# Altium PCB Arduino_DUE_V02b.PcbDoc (part 3 of 3)
Units mil, origin at the board's own origin, x right, y up, seen from the top; angles counter-clockwise.
Board outline 4416.66 x 2112 mil, 4 copper layers (Top Layer, Mid-Layer 1, Mid-Layer 2, Bottom Layer); 129 components, 175 nets, 644 pads, 366 vias.
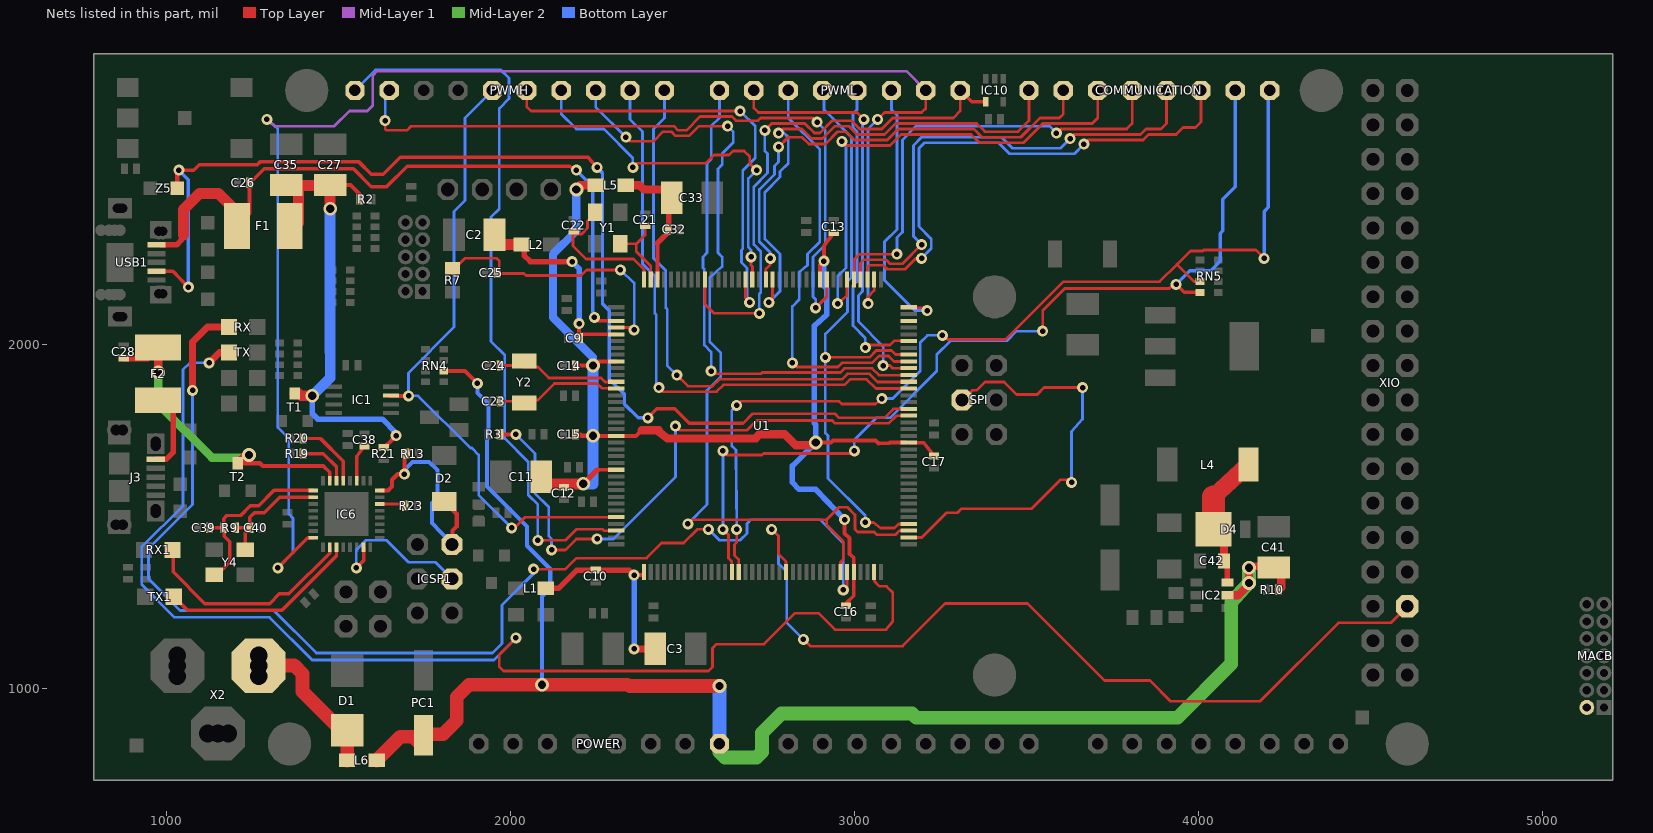
[diagram p5: the nets of this part, all layers, seen from the top]

## Via types
v1: diameter 32, hole 16, Top Layer to Bottom Layer, 313 vias
v2: diameter 40, hole 24, Top Layer to Bottom Layer, 52 vias
v3: diameter 36, hole 20, Top Layer to Bottom Layer, 1 vias

## Nets (pads, with @x,y where several pads share a name; then routed paths per layer and width w, separated by ;. In a path a pad name is that pad's centre, name@x,y a point inside that pad or via, vN(x,y) a via of type N, cw(c..) or ccw(c..) an arc to the next point about the centre after c; other vN are vias at no path point) (continued)
PIN51: U1.94 XIO.32 | length 2549
  Top Layer w8: v1(2759.98,1463) 2779.98,1443 2779.98,1391 2801.88,1369.1 U1.94@2801.88,1338.8 U1.94@2800.18,1338.8 ; v1(2851.98,1143) 2871.98,1123 3139.98,1123 3263.98,1247 3503.98,1247 3727.98,1023 3859.98,1023 3919.98,963 4179.98,963 4407.98,1191 4559.98,1191 XIO.32@4607.98,1239
  Bottom Layer w8: v1(2759.98,1463) 2779.98,1443 2779.98,1363 2803.98,1339 2803.98,1191 v1(2851.98,1143)
PWM2: PWML.3 U1.144 | length 807.7
  Top Layer w8: U1.144@3158.18,2108.49 3151.98,2107 3203.98,2107 v1(3211.98,2099)
  Bottom Layer w8: PWML.3@3107.98,2743 PWML.3@3107.98,2739 3107.98,2683 3123.98,2667 3123.98,2335 3087.98,2299 3087.98,2187 3175.98,2099 v1(3211.98,2099)
PWM3: PWML.4 U1.139 | length 912.4
  Top Layer w8: v1(3031.98,1991) 3039.98,1999 3103.98,1999 3115.98,2011 3151.98,2011 U1.139@3158.18,2010.06
  Bottom Layer w8: PWML.4@3007.98,2739 3007.98,2683 2995.98,2671 2995.98,2631 3007.98,2619 3007.98,2183 2995.98,2171 2995.98,2055 3031.98,2019 v1(3031.98,1991)
PWM5: PWML.6 U1.136 | length 1227.6
  Top Layer w8: v1(2819.98,1947) 2831.98,1935 2951.98,1935 2963.98,1947 3051.98,1947 3071.98,1967 3099.98,1967 3115.99,1951.01 U1.136@3158.18,1951.01
  Bottom Layer w8: PWML.6@2807.98,2739 2807.98,2659 2899.98,2567 2899.98,2299 2863.98,2263 2863.98,2231 2839.98,2211 2839.98,2131 2819.98,2111 v1(2819.98,1947)
PWM6: PWML.7 U1.135 | length 1214.6
  Top Layer w8: PWML.7@2707.98,2739 2707.98,2688 2720.98,2675 3007.98,2675 v1(3027.98,2655) ; v1(3083.98,1939) 3103.98,1939 3111.98,1931 3151.98,1931 U1.135@3158.18,1931.32
  Bottom Layer w8: v1(3027.98,2655) 3023.98,2651 3023.98,2155 3011.98,2143 3011.98,2067 3083.98,1995 v1(3083.98,1939)
PWM7: PWML.8 U1.134 | length 1438.5
  Top Layer w8: v1(2583.98,1923) 2591.98,1915 2727.98,1915 2731.98,1919 2959.98,1919 2971.98,1931 3051.98,1931 3071.98,1911 3155.98,1911 3156.62,1911.64 U1.134@3158.18,1911.64
  Bottom Layer w8: v1(2583.98,1923) 2583.98,1979 2563.98,1999 2563.98,2219 2559.98,2223 2559.98,2255 2571.98,2267 2571.98,2527 2583.98,2539 2583.98,2635 2607.98,2659 PWML.8@2607.98,2739
PWM8: PWMH.1 U1.133 | length 1581.8
  Top Layer w8: v1(2483.98,1911) 2515.98,1879 2587.98,1879 2607.98,1899 2963.98,1899 2979.98,1915 3043.98,1915 3067.98,1891 3151.98,1891 U1.133@3158.18,1891.95
  Bottom Layer w8: PWMH.1@2447.98,2739 2447.98,2659 2415.98,2627 2415.98,2251 2451.98,2215 2451.98,2107 2455.98,2103 2455.98,1939 v1(2483.98,1911)
PWM9: PWMH.2 U1.132 | length 1656.1
  Top Layer w8: v1(2431.98,1875) 2443.98,1863 2599.98,1863 2619.98,1883 2971.98,1883 2987.98,1899 3035.98,1899 3062.98,1872 3143.98,1872 3147.71,1872.27 U1.132@3158.18,1872.27
  Bottom Layer w8: PWMH.2@2347.98,2739 2347.98,2655 2383.98,2619 2383.98,2235 2419.98,2199 2419.98,2091 2423.98,2087 2423.98,1883 v1(2431.98,1875)
PWM11: PWMH.4 U1.20 | length 1104.5
  Top Layer w8: v1(2355.98,2515) 2367.98,2527 2567.98,2527 2591.98,2551 2635.98,2551 2647.98,2563 2679.98,2563 2695.98,2547 2695.98,2527 v1(2715.98,2507) ; v1(2699.98,2255) 2699.98,2231 2703.98,2227 2703.98,2195 U1.20@2703.45,2189.2
  Bottom Layer w8: PWMH.4@2147.98,2739 2147.98,2671 2191.98,2627 2271.98,2627 2355.98,2543 v1(2355.98,2515) ; v1(2699.98,2255) 2699.98,2275 2691.98,2283 2691.98,2483 v1(2715.98,2507)
PWM12: PWMH.5 U1.21 | length 1345
  Top Layer w8: PWMH.5@2047.98,2739 2047.98,2691 2059.98,2679 v1(2667.98,2679) ; U1.21@2683.77,2189.2 2683.77,2135.21 v1(2695.98,2123)
  Bottom Layer w8: v1(2667.98,2679) 2711.98,2635 2711.98,2543 2675.98,2507 2675.98,2279 2671.98,2275 2671.98,2239 2687.98,2223 2687.98,2131 v1(2695.98,2123)
PWM13: IC1.3 PWMH.6 U1.68 | length 1893.5
  Top Layer w8: IC1.3@1647.98,1851 IC1.3@1653.17,1851.76 ; v1(2003.98,1467) 2011.98,1467 2043.23,1498.25 U1.68@2307.78,1498.25
  Top Layer w12: IC1.3@1647.98,1851 v1(1703.98,1851)
  Bottom Layer w8: PWMH.6@1947.98,2739 1867.98,2659 1867.98,2419 1835.98,2387 1835.98,2051 1703.98,1917 v1(1703.98,1851) 1731.98,1851 1883.98,1699 1887.98,1699 1907.98,1679 1907.98,1563 v1(2003.98,1467)
RD+: IC6.29 R20.1 | length 201.4
  Top Layer w10: R20.1@1397.48,1727 1447.98,1727 1514.14,1660.84 IC6.29@1514.14,1603.46
RD-: IC6.30 R19.1 | length 156
  Top Layer w10: R19.1@1397.48,1683 1397.57,1684.59 1399.98,1683 1455.98,1683 1494.45,1644.53 IC6.30@1494.45,1603.46
RESET2: D2.A IC6.24 ICSP1.5 R13.1 | length 688.8
  Top Layer w12: IC6.24@1620.44,1575.9 1644.88,1575.9 1655.98,1587 1655.98,1607 1671.98,1623 v1(1691.98,1623) 1691.98,1681.41 R13.1@1698.48,1683 ; D2.A@1807.98,1544.07 1843.98,1508.07 1843.98,1471 1831.98,1459 1831.98,1419 ICSP1.5@1829.98,1419
  Bottom Layer w12: v1(1691.98,1623) 1691.98,1635 1715.98,1659 1763.98,1659 1787.98,1635 1787.98,1555 1771.98,1539 1771.98,1481 1827.98,1423 1829.98,1421 ICSP1.5@1829.98,1419
RESET_CMD: IC6.22 R23.1 | length 74.7
  Top Layer w10: IC6.22@1620.44,1536.53 1672.86,1536.53 R23.1@1694.48,1531
RESETA: MACB.2
RX: IC10.4 PWML.1 U1.27 | length 1585.5
  Top Layer w8: U1.27@2565.66,2189.2 2565.66,2117.32 2591.98,2091 v1(2723.98,2091) ; v1(2739.98,2623) 2759.98,2643 2855.98,2643 2883.98,2615 2899.98,2615 2935.98,2651 2991.98,2651 3015.98,2627 3079.98,2627 3111.98,2659 3287.98,2659 3307.98,2679 PWML.1@3307.98,2739
  Top Layer w10: PWML.1@3307.98,2739 3341.44,2705.54 IC10.4@3382.39,2705.54
  Bottom Layer w8: v1(2723.98,2091) 2723.98,2147 2727.98,2151 2727.98,2271 2707.98,2291 2707.98,2459 2747.98,2499 2747.98,2555 2739.98,2563 v1(2739.98,2623)
RXD0: COMMUNICATION.2 U1.18 | length 1419.7
  Top Layer w8: U1.18@2742.82,2189.2 2742.98,2220 2755.98,2233 v1(2755.98,2251) ; v1(2779.98,2575) 2807.98,2603 2847.98,2603 2867.98,2583 2915.98,2583 2951.98,2619 2975.98,2619 2999.98,2595 3095.98,2595 3127.98,2627 3347.98,2627 3371.98,2603 3483.98,2603 3539.98,2659 3595.98,2659 3607.98,2671 COMMUNICATION.2@3607.98,2739
  Bottom Layer w8: v1(2755.98,2251) 2755.98,2267 2723.98,2299 2723.98,2451 2767.98,2495 2767.98,2519 2779.98,2531 v1(2779.98,2575)
RXD1: COMMUNICATION.4 U1.5 | length 1328
  Top Layer w8: U1.5@2998.73,2189.2 2999.98,2195 2999.98,2247.69 3015.29,2263 v1(3123.98,2263) ; v1(3587.98,2615) 3599.98,2627 3791.98,2627 3807.98,2643 COMMUNICATION.4@3807.98,2739
  Bottom Layer w8: v1(3123.98,2263) 3123.98,2311 3139.98,2327 3139.98,2595 3179.98,2635 3567.98,2635 v1(3587.98,2615)
RXD2: COMMUNICATION.6 U1.3 | length 1531
  Top Layer w8: U1.3@3038.1,2189.2 3038.1,2225.12 3043.98,2231 3083.98,2231 3095.98,2219 3147.98,2219 3179.98,2251 v1(3195.98,2251) ; v1(3667.98,2583) 3679.98,2595 3839.98,2595 3855.98,2611 3935.98,2611 3955.98,2631 3991.98,2631 4007.98,2647 COMMUNICATION.6@4007.98,2739
  Bottom Layer w8: v1(3195.98,2251) 3223.98,2279 3223.98,2307 3187.98,2343 3187.98,2571 3203.98,2587 3419.98,2587 3451.98,2555 3639.98,2555 v1(3667.98,2583)
RXL: RX.C U1.103 | length 3473.6
  Top Layer w8: v1(2067.98,1347) 2159.98,1347 2191.98,1379 2395.98,1379 2439.98,1423 2503.98,1423 2543.98,1463 v1(2575.98,1463) ; v1(2967.98,1287) 2979.04,1294.06 U1.103@2979.04,1338.8 U1.103@2979.98,1338.8
  Top Layer w20: v1(1075.98,1867) 1075.98,2007 1119.98,2051 RX.C@1181.64,2051
  Bottom Layer w8: v1(1075.98,1867) 1075.98,1535 947.98,1407 947.98,1319 1039.98,1227 1311.98,1227 1435.98,1103 1947.98,1103 1975.98,1131 1975.98,1243 2067.98,1335 v1(2067.98,1347) ; v1(2575.98,1463) 2607.98,1431 2667.98,1431 2687.98,1451 2687.98,1479 2699.98,1491 2899.98,1491 2967.98,1423 v1(2967.98,1287)
RXL-U2: IC6.10 RX1.C | length 634.7
  Top Layer w10: RX1.C@1017.32,1403 1019.98,1388.34 1019.98,1339 1111.98,1247 1299.98,1247 1327.98,1275 1355.98,1275 1474.77,1393.79 IC6.10@1474.77,1410.54
SCK2: IC6.15 ICSP1.3 | length 456.3
  Top Layer w10: v1(1551.98,1351) 1573.19,1372.21 IC6.15@1573.19,1410.54
  Bottom Layer w8: v1(1551.98,1351) 1551.98,1403 1579.98,1431 1639.98,1431 1703.98,1367 1781.98,1367 ICSP1.3@1829.98,1319
SCL0-3: COMMUNICATION.8 RN5.7 U1.87 | length 2880.9
  Top Layer w8: v1(2657.98,1463) 2657.98,1425 2651.98,1419 2651.98,1387 2663.98,1375 2663.98,1339 U1.87@2664.08,1338.8 ; v1(2657.98,1823) 2669.98,1835 2955.98,1835 2963.98,1827 3061.98,1827 v1(3079.98,1843) ; v1(3255.98,2027) 3259.98,2027 3271.98,2015 3439.98,2015 3607.98,2183 3887.98,2183 3937.98,2233 ; RN5.7@4005.41,2183.25 3987.73,2183.25 3937.98,2233 ; v1(4191.98,2251) 4167.98,2275 4015.98,2275 4013.41,2272.43 3977.41,2272.43 3937.98,2233
  Bottom Layer w8: v1(2657.98,1463) 2655.98,1693 2643.98,1705 2643.98,1809 v1(2657.98,1823) ; v1(3079.98,1843) 3111.98,1843 3191.98,1923 3191.98,2006 3212.98,2027 v1(3255.98,2027)
  Bottom Layer w10: v1(4191.98,2251) 4191.98,2387 4203.98,2399 4203.98,2735 COMMUNICATION.8@4207.98,2739
SCL1: PWMH.10 U1.70 | length 2151.2
  Top Layer w8: v1(2079.98,1431) 2159.98,1431 2191.98,1463 2267.98,1463 2271.98,1459 2307.66,1459 U1.70@2307.78,1458.88 U1.70@2303.98,1459
  Bottom Layer w8: PWMH.10@1547.98,2739 1607.98,2799 1971.98,2799 1995.98,2775 1995.98,2715 1967.98,2687 1967.98,2395 1943.98,2371 1943.98,2009 1983.98,1969 1983.98,1727 2051.98,1659 2051.98,1563 2079.98,1535 v1(2079.98,1431)
SDA0-3: COMMUNICATION.7 RN5.8 U1.86 | length 2727.2
  Top Layer w8: v1(2617.98,1463) 2633.98,1447 2633.98,1379 2643.78,1369.2 U1.86@2643.78,1342.8 ; v1(2617.98,1691) 2629.98,1679 2731.98,1679 2735.98,1683 2991.98,1683 v1(2999.98,1691) ; U1.86@2644.4,1338.8 U1.86@2643.78,1342.8 ; U1.86@2645.98,1339 U1.86@2643.78,1342.8 ; v1(3547.98,2039) 3547.98,2099 3611.98,2163 3915.98,2163 3927.98,2175 v1(3935.98,2175)
  Top Layer w10: v1(3935.98,2175) 3959.22,2151.76 RN5.8@4005.41,2151.76
  Bottom Layer w8: v1(2617.98,1463) v1(2617.98,1691) ; v1(2999.98,1691) 2999.98,1723 3063.98,1787 3103.98,1787 3239.98,1923 3239.98,1971 3279.98,2011 3443.98,2011 3471.98,2039 v1(3547.98,2039)
  Bottom Layer w10: v1(3935.98,2175) 3975.98,2215 4035.98,2215 4063.98,2243 4063.98,2323 4071.98,2331 4071.98,2423 4107.98,2459 COMMUNICATION.7@4107.98,2739
SDA1: PWMH.9 U1.9 | length 2079.6
  Top Layer w8: v1(1635.98,2651) 1635.98,2627 1639.98,2623 1699.98,2623 1711.98,2635 2475.98,2635 2487.98,2623 2511.98,2623 2551.98,2663 2643.98,2663 2655.98,2651 2719.98,2651 2727.98,2659 2879.98,2659 v1(2891.98,2647) ; v1(2887.98,2107) 2919.98,2139 2919.98,2187 U1.9@2919.99,2189.2
  Bottom Layer w8: v1(1635.98,2651) 1635.98,2731 1639.98,2735 PWMH.9@1647.98,2739 ; v1(2887.98,2107) 2887.98,2131 2879.98,2139 2879.98,2255 2915.98,2291 2915.98,2623 v1(2891.98,2647)
SPCK: SPI.3 U1.110 | length 1229.7
  Top Layer w8: U1.110@3158.18,1439.2 3196.18,1439.2 3267.98,1511 3299.98,1511 3311.98,1523 3515.98,1523 3599.98,1607 3623.98,1607 v1(3631.98,1599) ; SPI.3@3312.98,1839 3343.98,1867 3355.98,1867 3379.98,1891 3435.98,1891 3471.98,1855 3531.98,1855 3551.98,1875 v1(3663.98,1875)
  Bottom Layer w8: v1(3631.98,1599) 3631.98,1747 3663.98,1783 v1(3663.98,1875)
SS0/PWM10: PWMH.3 U1.102 U1.111 | length 2657.2
  Top Layer w8: v1(2335.98,2603) 2347.98,2591 2415.98,2591 2443.98,2619 2467.98,2619 2479.98,2607 2519.98,2607 2547.98,2635 v1(2631.98,2635) ; v1(2515.98,1479) 2527.98,1491 2919.98,1491 ; U1.102@2959.36,1338.8 2959.98,1339 2959.98,1367 2967.98,1375 2967.98,1427 2919.98,1475 2919.98,1491 ; U1.111@3158.18,1458.88 3151.98,1459 3131.98,1459 3119.98,1447 3065.98,1447 3057.98,1455 3009.98,1455 3001.98,1463 3001.98,1505 2979.98,1527 2955.98,1527 2919.98,1491
  Bottom Layer w8: PWMH.3@2247.98,2739 2247.98,2691 v1(2335.98,2603) ; v1(2515.98,1479) 2571.98,1535 2571.98,1867 2611.98,1907 2611.98,1975 2579.98,2007 2579.98,2195 2615.98,2227 2615.98,2255 2603.98,2267 2603.98,2511 2615.98,2523 2615.98,2555 2647.98,2587 2647.98,2619 v1(2631.98,2635)
SS1/PWM4: PWML.5 U1.112 U1.137 | length 1764.5
  Top Layer w8: v1(2915.98,1963) 3043.98,1963 3063.98,1983 3107.98,1983 3119.98,1971 3151.98,1971 U1.137@3158.18,1970.69 ; v1(3031.98,1483) 3055.98,1483 3075.98,1467 3116.98,1467 3129.41,1478.57 U1.112@3158.18,1478.57
  Bottom Layer w8: PWML.5@2907.98,2739 2911.98,2739 2911.98,2683 2991.98,2603 2991.98,2195 2979.98,2183 2979.98,2095 2915.98,2031 v1(2915.98,1963) 2915.98,1743 2923.98,1735 2923.98,1611 3031.98,1503 v1(3031.98,1483)
SS3: U1.142
SW: C42.2 D4.P$1 IC2.6 L4.P$1 | length 410.1
  Top Layer w16: D4.P$1@4044.42,1463 D4.P$1@4074.98,1444.44 ; C42.2@4074.98,1371 4085.26,1364.72 IC2.6@4085.26,1308.4
  Top Layer w24: C42.2@4074.98,1371 D4.P$1@4074.98,1444.44
  Top Layer w50: 4044.42,1557.33 L4.P$1@4146.09,1651
  Top Layer w66: D4.P$1@4044.42,1463 4044.42,1557.33
TX: IC6.8 PWML.2 U1.2 | length 4389.5
  Top Layer w8: v1(3039.98,2119) 3039.78,2121.2 3039.78,2138.8 3057.98,2157 U1.2@3057.78,2189.2 ; v1(3067.98,2655) 3087.98,2675 3195.98,2675 3207.98,2687 PWML.2@3207.98,2739
  Top Layer w10: v1(1323.98,1351) 1411.08,1438.1 IC6.8@1427.52,1438.1
  Mid-Layer 1 w8: v1(1291.98,2655) 1315.98,2635 1487.98,2635 1531.98,2679 1583.98,2679 1599.98,2695 1599.98,2783 1611.98,2795 3151.98,2795 PWML.2@3207.98,2739
  Bottom Layer w8: v1(1291.98,2655) 1323.98,2627 1323.98,1759 1355.98,1727 1355.98,1507 1367.98,1495 1367.98,1395 v1(1323.98,1351) ; v1(3039.98,2119) 3039.98,2627 v1(3067.98,2655)
TXD0: COMMUNICATION.1 U1.17 | length 1537.4
  Top Layer w8: v1(2751.98,2123) 2762.51,2132.47 U1.17@2762.51,2189.2 ; v1(2779.98,2615) 2791.98,2627 2847.98,2627 2875.98,2599 2907.98,2599 2943.98,2635 2983.98,2635 3007.98,2611 3087.98,2611 3119.98,2643 3355.98,2643 3379.98,2619 3475.98,2619 3507.98,2651 COMMUNICATION.1@3507.98,2739
  Bottom Layer w8: v1(2751.98,2123) 2783.98,2155 2783.98,2263 2739.98,2307 2739.98,2443 2783.98,2487 2783.98,2503 2807.98,2527 2807.98,2603 2795.98,2615 v1(2779.98,2615)
TXD1: COMMUNICATION.3 U1.6 | length 1452.1
  Top Layer w8: v1(2951.98,2119) 2977.98,2141 2977.98,2189 2978.18,2189.2 U1.6@2979.04,2189.2 ; v1(2963.98,2591) 2975.98,2579 3103.98,2579 3135.98,2611 3339.98,2611 3363.98,2587 3491.98,2587 3547.98,2643 3691.98,2643 3707.98,2659 COMMUNICATION.3@3707.98,2739
  Bottom Layer w8: v1(2951.98,2119) 2951.98,2199 2975.98,2223 2975.98,2579 v1(2963.98,2591)
TXD2: COMMUNICATION.5 U1.4 | length 1440.9
  Top Layer w8: U1.4@3018.41,2189.2 3018.41,2237.43 3027.98,2247 3091.98,2247 3103.98,2235 3139.98,2235 v1(3195.98,2291) ; v1(3627.98,2599) 3639.98,2611 3831.98,2611 3847.98,2627 3891.98,2627 3907.98,2643 COMMUNICATION.5@3907.98,2739
  Bottom Layer w8: v1(3195.98,2291) 3171.98,2315 3171.98,2579 3195.98,2603 3427.98,2603 3459.98,2571 3599.98,2571 v1(3627.98,2599)
TXL: TX.C U1.107 | length 3596.9
  Top Layer w8: v1(2015.98,1147) 1967.98,1099 1967.98,1063 1979.98,1051 2575.98,1051 2587.98,1063 2587.98,1117 2599.98,1129 2737.98,1129 2827.98,1219 2895.98,1219 2943.98,1171 3091.98,1171 3111.98,1195 3111.98,1279 3093.98,1297 3073.98,1297 3057.78,1313.2 U1.107@3057.78,1338.8
  Top Layer w20: v1(1123.98,1947) 1153.98,1977 TX.C@1181.64,1977
  Bottom Layer w8: v1(1123.98,1947) 1067.98,1947 1047.98,1927 1047.98,1531 927.98,1411 927.98,1303 1023.98,1207 1299.98,1207 1423.98,1083 1951.98,1083 v1(2015.98,1147)
TXL-U2: IC6.11 TX1.C | length 580.4
  Top Layer w10: TX1.C@1021.32,1267 1061.32,1227 1335.98,1227 1494.45,1385.47 IC6.11@1494.45,1410.54
UOTGID: U1.129 USB1.4 Z5.2 | length 3426.4
  Top Layer w8: 2675.98,1771 2703.98,1799 2943.98,1799 2955.98,1787 3087.98,1787 3114.19,1813.21 U1.129@3158.18,1813.21
  Top Layer w10: USB1.4@967.98,2213 USB1.4@979.98,2213 ; USB1.4@971.28,2213.41 980.97,2213.41 ccw(c980.97,2212.01) USB1.4@979.98,2213 ; v1(1035.98,2507) 1079.98,2507 1095.98,2523 1263.98,2523 1271.98,2531 1559.98,2531 1595.98,2495 1629.98,2495 1679.98,2545 2225.98,2545 v1(2251.98,2515) ; v1(1063.98,2167) 1018.98,2213 USB1.4@979.98,2213 ; v1(2399.98,1787) 2425.98,1813 2477.98,1813 2519.98,1771 2675.98,1771
  Top Layer w12: Z5.2@1031.35,2455 1031.35,2502.37 v1(1035.98,2507)
  Bottom Layer w10: v1(1035.98,2507) 1063.98,2479 v1(1063.98,2167) ; v1(2251.98,2515) 2267.98,2499 2267.98,2119 2287.98,2099 2287.98,1899 2331.98,1855 2331.98,1827 2371.98,1787 v1(2399.98,1787)
UOTGVBOF: R3.1 U1.128 | length 1728.6
  Top Layer w8: v1(2119.98,1403) 2159.98,1403 2191.98,1435 v1(2251.98,1435) ; v1(2479.98,1763) 2491.98,1751 2687.98,1751 2715.98,1779 2935.98,1779 2943.98,1771 3099.98,1771 3121.98,1793 3149.98,1793 U1.128@3158.18,1793.53
  Top Layer w12: R3.1@1969.48,1739 v1(2015.98,1739)
  Bottom Layer w8: v1(2015.98,1739) 2071.98,1683 2071.98,1567 2111.98,1527 2111.98,1443 2119.98,1435 v1(2119.98,1403) ; v1(2251.98,1435) 2299.98,1435 2479.98,1615 v1(2479.98,1763)
USBVCC: C27.+ C35.+ F1.1 R2.2 R21.2 T1.1 | length 1448.4
  Top Layer w12: C27.+@1475.98,2463.94 1535.04,2463.94 1562.48,2436.5 R2.2@1562.48,2423 ; R21.2@1631.98,1700.5 1641.57,1708.59 v1(1667.98,1735)
  Top Layer w16: C35.+@1347.55,2463.51 C35.+@1347.98,2463.94
  Top Layer w30: T1.1@1372.98,1858 1373.98,1859 1383.98,1859 1391.98,1851 v2(1423.98,1851)
  Top Layer w32: C35.+@1347.98,2463.94 1360.82,2463.51 1375.98,2463 C35.+@1383.98,2463 ; F1.1@1358.75,2345 1383.98,2353 C35.+@1383.98,2463 ; C27.+@1471.98,2459.94 C27.+@1475.98,2463.94 C27.+@1475.98,2463 ; v2(1475.98,2395) C27.+@1475.98,2463 ; C35.+@1383.98,2463 C27.+@1475.98,2463
  Bottom Layer w16: v2(1423.98,1851) 1423.98,1799 1439.98,1783 1627.98,1783 1667.98,1743 v1(1667.98,1735)
  Bottom Layer w30: v2(1423.98,1851) 1475.98,1903 1475.98,1979
  Bottom Layer w32: 1475.98,1979 v2(1475.98,2395)
USBVCCU2: C28.1 F2.1 IC6.31 T2.1 | length 955.8
  Top Layer w10: 1455.98,1647 1474.77,1628.21 IC6.31@1474.77,1603.46
  Top Layer w12: T2.1@1206.98,1655 1271.98,1655 1279.98,1647 1455.98,1647
  Top Layer w20: C28.1@875.98,1961.5 945.71,1961.5 F2.1@975.98,1991.77
  Top Layer w24: v2(975.98,1919) F2.1@975.98,1991.77 ; T2.1@1206.98,1655 1230.98,1679 v2(1239.98,1679)
  Mid-Layer 2 w24: v2(975.98,1919) 975.98,1827 1131.98,1671 1231.98,1671 v2(1239.98,1679)
VBG: C25.1 R7.2 U1.40 | length 804.5
  Top Layer w8: R7.2@1831.98,2222 1838.98,2222 1867.98,2251 1959.98,2251 1967.98,2243 1967.98,2210.59 C25.1@1961.48,2209 1971.57,2207 2039.98,2207 2045.98,2201 2205.98,2201 2221.98,2217 v1(2319.98,2217) ; U1.40@2307.78,2049.43 2312.98,2050 2352.98,2050 v1(2359.98,2043)
  Bottom Layer w8: v1(2319.98,2217) 2359.98,2179 v1(2359.98,2043)
VDDANA: C3.+ C10.2 L1.2 U1.73 | length 597.2
  Top Layer w8: U1.73@2387.49,1330 U1.73@2388.49,1338.8
  Top Layer w12: v1(2359.98,1330) U1.73@2387.49,1330
  Top Layer w16: L1.2@2103.29,1291 2139.98,1291 2193.48,1344.5 C10.2@2247.98,1344.5 2345.48,1344.5 v1(2359.98,1330)
  Top Layer w20: v1(2359.98,1115) C3.+@2420.92,1115
  Bottom Layer w16: v1(2359.98,1115) v1(2359.98,1330)
VDDOUT: C11.+ C12.2 C13.2 C14.2 C15.2 C16.2 C17.2 L5.1 U1.10 U1.45 U1.56 U1.61 U1.104 U1.124 | length 3913
  Top Layer w8: C11.+@2087.98,1619 2090.04,1616.94 C11.+@2090.04,1616 ; C11.+@2095.98,1587 C11.+@2103.98,1595 ; C15.2@2189.48,1739 2199.98,1739 ; C14.2@2189.48,1939 2199.98,1939 ; L5.1@2239.98,2463 L5.1@2248.67,2463 ; U1.61@2303.98,1636 U1.61@2307.78,1636.05 U1.61@2311.98,1635 ; C16.2@2965.48,1247 C16.2@2975.98,1240.5 ; U1.124@3151.98,1715 U1.124@3158.18,1714.79 ; C17.2@3231.98,1675 C17.2@3231.98,1676.5
  Top Layer w10: C12.2@2155.98,1584.5 2173.57,1592.59 2175.98,1595 ; U1.124@3158.18,1714.79 3201.78,1714.79 C17.2@3231.98,1676.5
  Top Layer w11: C15.2@2189.48,1739 2203.98,1739 2203.98,1735 ; v2@2251.97,1951.01 U1.45@2307.78,1951.01 ; 2251.98,1635 2248.98,1636 U1.61@2303.98,1636 ; U1.10@2900.3,2189.2 2900.3,2231.32 v1(2911.98,2243) ; C16.2@2975.98,1240.5 2975.98,1247 2998.73,1269.75 U1.104@2998.73,1338.8 2998.73,1380.25 2985.98,1391 ; 3069.98,1713 3101.98,1713 3103.98,1715 U1.124@3151.98,1715
  Top Layer w11.5: v2@2244.51,1734.47 U1.56@2307.78,1734.47 2365.45,1734.47
  Top Layer w12: 2199.98,1939 v2(2239.98,1939) v2@2251.97,1951.01 ; 2203.98,1735 v2(2239.98,1735) v2@2244.51,1734.47 ; 2365.45,1734.47 2381.98,1751 ; v2(2887.98,1715) 2931.98,1715 2937.98,1721 3061.98,1721 3069.98,1713 ; v1(2911.98,2243) 2911.98,2287 C13.2@2939.98,2325.5 ; v1(2971.98,1491) 2971.98,1451 2985.98,1437 2985.98,1391
  Top Layer w16: v2(2211.98,1595) 2251.98,1635
  Top Layer w24: v2(2191.98,2451) 2201.98,2463 2239.98,2463 L5.1@2239.98,2465 ; 2381.98,1751 2431.98,1751 2431.98,1747 2455.98,1727 2713.98,1727 2723.98,1739 2797.98,1739 2829.98,1707 2889.98,1707 v2(2887.98,1715)
  Top Layer w32: C11.+@2087.98,1619 2087.98,1595 2103.98,1595 2175.98,1595 v2(2211.98,1595)
  Bottom Layer w16: v1(2911.98,2243) 2911.98,2171 2919.98,2163 2919.98,2087 2883.98,2055 2883.98,1771 2887.98,1767 v2(2887.98,1715) 2819.98,1647 2819.98,1599 2839.98,1579 2887.98,1579 v1(2971.98,1491)
  Bottom Layer w24: v2(2191.98,2451) 2191.98,2331 2123.98,2263 2123.98,2079 2239.98,1963 v2(2239.98,1939)
  Bottom Layer w32: v2(2211.98,1595) 2239.98,1595 v2(2239.98,1735) v2(2239.98,1939)
VDDOUTMI: C2.+ C9.2 L2.2 U1.41 | length 645
  Top Layer w8: C2.+@1954.04,2319 1954.04,2304.94 1951.98,2307 1951.98,2291 C2.+@1956.98,2294 ; L2.2@2032.67,2291 L2.2@2039.98,2291
  Top Layer w10: C9.2@2201.23,2029.75 2199.98,2029.75 2199.98,2027 C9.2@2201.48,2019
  Top Layer w11: C9.2@2201.23,2029.75 U1.41@2307.78,2029.75
  Top Layer w12: v1(2199.98,2061) 2199.98,2031 C9.2@2201.23,2029.75
  Top Layer w16: L2.2@2039.98,2291 2039.98,2259 2057.98,2241 v1(2179.98,2241)
  Top Layer w32: C2.+@1951.98,2291 L2.2@2032.67,2291
  Bottom Layer w16: v1(2179.98,2241) 2199.98,2221 v1(2199.98,2061)
VDDPLL: C32.2 C33.+ L5.2 U1.34 | length 463.4
  Top Layer w8: L5.2@2327.98,2463 L5.2@2335.29,2463 ; C33.+@2459.98,2419 C33.+@2471.98,2435 ; C33.+@2468.92,2427 C33.+@2471.98,2435 ; C33.+@2471.98,2459 2471.98,2443 C33.+@2471.98,2435
  Top Layer w11: U1.34@2427.86,2189.2 2427.86,2294.88
  Top Layer w16: 2427.86,2294.88 C32.2@2459.98,2327 ; C32.2@2458.48,2335 C32.2@2459.98,2327 ; C33.+@2459.98,2419 C32.2@2459.98,2327
  Top Layer w24: L5.2@2327.98,2463 2375.98,2463 2387.98,2451 2463.98,2451 C33.+@2471.98,2443
VIN: C41.+ IC2.5 L6.1 PC1.+ POWER.8 R10.1 RN4.6 | length 4682.4
  Top Layer w12: RN4.6@1806.55,1923.25 1867.98,1923 v1(1903.98,1887)
  Top Layer w16: v2(4147.98,1351) v2@4152.92,1355.94
  Top Layer w24: IC2.5@4085.26,1271 4115.98,1271 4147.98,1303 v2(4147.98,1307) v2(4147.98,1351) ; v2@4152.92,1355.94 C41.+@4219.98,1351.94 4241.57,1330.35 4241.57,1292.59 4235.98,1287 R10.1@4233.48,1287
  Top Layer w40: L6.1@1611.29,791 1680.29,860 1716.98,860 1746.98,830 PC1.+@1746.98,864.51 1749.47,867 1803.98,867 1843.98,907 1843.98,975 1879.98,1011 v2(2091.98,1011) 2339.98,1011 2347.98,1007 v2(2607.98,1007)
  Mid-Layer 2 w40: POWER.8@2607.98,839 2607.98,815 2623.98,799 2715.98,799 2731.98,815 2731.98,871 2787.98,927 3167.98,927 3179.98,915 3939.98,915 4095.98,1071 4095.98,1251 v2(4147.98,1307) v2(4147.98,1351)
  Bottom Layer w12: v1(1903.98,1887) 1903.98,1859 1935.98,1827 1935.98,1755 1931.98,1751 1931.98,1587 2047.98,1471 2047.98,1415 2115.98,1347 2115.98,1291 2091.98,1267 v2(2091.98,1011)
  Bottom Layer w40: POWER.8@2607.98,839 v2(2607.98,1007)
VIN+: D1.C L6.2 X2.2 | length 451.7
  Top Layer w40: X2.2@1267.98,1066 1268.98,1067 1371.98,1067 1395.98,1043 1395.98,991 1488.59,898.39 D1.C@1525.98,878.39 1525.98,792.31 L6.2@1524.67,791
VUCAP: C38.1 IC6.27 | length 109.4
  Top Layer w10: IC6.27@1553.51,1603.46 1553.51,1674.94 C38.1@1575.98,1705.5
XIN: C22.1 U1.36 Y1.1 | length 439.2
  Top Layer w8: C22.1@2183.98,2329.5 C22.1@2182.48,2321.5 ; Y1.1@2235.98,2367 Y1.1@2243.98,2383 ; U1.36@2388.49,2189.2 2388.49,2218.49 2357.98,2249 2219.98,2249 2182.48,2286.5 C22.1@2182.48,2321.5 ; C22.1@2182.48,2321.5 2207.79,2321.5 2223.98,2339 2223.98,2359 Y1.1@2246.56,2384.28 ; Y1.1@2243.98,2383 Y1.1@2246.56,2384.28 ; Y1.1@2243.98,2383 2247.98,2387 Y1.1@2246.56,2384.28
XIN32: C24.1 U1.48 Y2.P$2 | length 391.7
  Top Layer w8: C24.1@1969.48,1939 Y2.P$2@2029,1939 ; U1.48@2307.78,1891.95 2303.98,1891 2275.98,1891 2263.98,1903 2111.98,1903 2079.98,1935 Y2.P$2@2038,1935 ; Y2.P$2@2029,1939 Y2.P$2@2038,1935 ; Y2.P$2@2029,1939 Y2.P$2@2039.98,1952.02 Y2.P$2@2038,1935
XOUT: C21.1 U1.35 Y1.3 | length 247.7
  Top Layer w8: Y1.3@2319.98,2291 Y1.3@2319.4,2293.72 2319.98,2299 2319.98,2293 2365.98,2293 ; C21.1@2391.98,2345.5 2391.98,2347 2391.98,2318.89 2366.09,2293 2365.98,2293 ; U1.35@2408.18,2189.2 2407.98,2195 2407.98,2229.11 2382.09,2255 2381.98,2255 2365.98,2271 2365.98,2293
XOUT32: C23.1 U1.49 Y2.P$1 | length 389.3
  Top Layer w8: C23.1@1969.48,1835 Y2.P$1@2037,1835 ; U1.49@2307.78,1872.27 2303.98,1872.27 2303.98,1873 2265.98,1873 2251.98,1887 2127.98,1887 2079.98,1839 Y2.P$1@2055.96,1839 ; Y2.P$1@2037,1835 Y2.P$1@2055.96,1839 ; Y2.P$1@2037,1835 Y2.P$1@2039.98,1829.98 Y2.P$1@2055.96,1839
XT1: C39.1 IC6.1 R9.1 Y4.1 | length 530.3
  Top Layer w10: C39.1@1125.48,1467 R9.1@1166.48,1467 ; Y4.1@1138.7,1330.58 1147.56,1330.58 1183.98,1367 1183.98,1427 1167.98,1443 1167.98,1465.5 R9.1@1166.48,1467 ; IC6.1@1427.52,1575.9 1312.88,1575.9 1267.98,1531 1243.98,1531 1215.98,1503 1175.98,1503 1166.48,1493.5 R9.1@1166.48,1467
XT2: C40.1 IC6.2 R9.2 Y4.3 | length 353.4
  Top Layer w10: R9.2@1203.98,1469.5 R9.2@1201.48,1467 C40.1@1242.48,1467 ; Y4.3@1229.26,1403.42 1229.26,1453.78 C40.1@1242.48,1467 ; IC6.2@1427.52,1556.21 1329.19,1556.21 1283.98,1511 1255.98,1511 1242.48,1497.5 C40.1@1242.48,1467
XUSB: C26.1 F1.2 U1.39 USB1.1 | length 2083.8
  Top Layer w10: USB1.1@971.28,2290.18 982,2290.18 ccw(c983.21,2292.48) USB1.1@983.98,2290 ; C26.1@1241.48,2471 1243.98,2471 1283.98,2511 1543.98,2511 1595.98,2459 1639.98,2459 1699.98,2519 2171.98,2519 2187.98,2507 v1(2191.98,2507) ; v1(2243.98,2079) 2253.86,2069.12 U1.39@2307.78,2069.12
  Top Layer w12: F1.2@1205.21,2345 1241.48,2381.27 C26.1@1241.48,2471
  Top Layer w16: USB1.1@982.98,2290 983.98,2290 1029.98,2290 1049.98,2311 1049.98,2319
  Top Layer w32: 1049.98,2319 1049.98,2393 1095.98,2439 1151.98,2439 1203.98,2387 1203.98,2346.23 F1.2@1205.21,2345
  Bottom Layer w10: v1(2191.98,2507) 2239.98,2459 2239.98,2095 2243.98,2091 v1(2243.98,2079)
XVCC: F2.2 J3.P1 | length 254.9
  Top Layer w16: J3.P1@968.98,1666 998.98,1666 1019.98,1687 1019.98,1838.23 F2.2@975.98,1838.23
pads on no net: FID1.P$1 FID2.P$1 FID3.P$1 FID4.P$1 IC6.5 IC6.6 IC6.7 IC6.12 IC6.14 IC6.25 JTAG.7 MACB.4 MACB.6 RESET.5 RN5.3 RN5.4 RN5.5 RN5.6 U1.50 U1.69 U1.93 U1.117 U1.131 U1.138 U1.141 U1.143 USB1. X2.4 X2.5 X2.6 X2.7 X2.8 X2.9

## Keep-outs
Keep-Out Layer:
  lines w10: 807.98,778.37 ccw(c847.35,778.37) 847.35,739 4668.61,739 ccw(c4668.61,778.37) 4707.98,778.37 4707.98,839 4807.98,939 4807.98,2229 4707.98,2329 4707.98,2779 4647.98,2839 847.35,2839 ccw(c847.35,2799.63) 807.98,2799.63 807.98,778.37

## Other copper
Top Layer:
  text "5V" at 1323.98,1731 h50
Mid-Layer 1:
  text "This is actually a plane layer..." at 1650,550 h60
Mid-Layer 2:
  text "This is actually a plane layer..." at 1650,550 h60

## Silkscreen, mask and mechanical layers (free items; w line width, h text height)
Top Overlay:
  circle w12: c1647.98,1761 r7.07
  lines w8: 1755.98,2421 1755.98,2455 1763.98,2455 1763.98,2423 1791.98,2395 1819.98,2395 1819.98,2387 1789.98,2387 1755.98,2421
  lines w12: 1962.98,2549 1997.98,2514 2407.98,2514 ; 2627.98,2514 3067.98,2514 3107.98,2554 ; 2784.98,1003 2812.98,1031 2932.98,1031 ; 3212.98,2399 3257.98,2354 3307.98,2354 ; 3615.98,1031 4028.98,1031 4051.98,1008 ; 4092.98,2354 4162.98,2354 4207.98,2399 ; 4302.98,1644 4302.98,1184 4342.98,1144 ; 4302.98,2059 4302.98,2599 4342.98,2639 ; 4507.98,964 4507.98,944 4607.98,944 4607.98,964 ; 4507.98,2789 4507.98,2814 4607.98,2814 4607.98,2789
  lines w16: 3182.98,2539 3207.98,2589 3232.98,2539 ; 3182.98,2539 3207.98,2539 ; 3182.98,2539 3207.98,2564 ; 3207.98,2539 3207.98,2564 ; 3207.98,2539 3232.98,2539 ; 3207.98,2564 3232.98,2539 ; 3282.98,2589 3307.98,2589 ; 3282.98,2589 3307.98,2539 3332.98,2589 ; 3282.98,2589 3307.98,2564 ; 3307.98,2564 3332.98,2589 ; 3307.98,2564 3307.98,2589 ; 3307.98,2589 3332.98,2589
  text "M.Banzi" at 787.98,2839 h45 r180
  text "5V" at 4487.98,2824 h44 r180
  text "D.Cuartielles" at 787.98,2759 h45 r180
  text "T.Igoe" at 787.98,2679 h45 r180
  text "9" at 2382.98,2614 h56 r90
  text "8" at 2482.98,2614 h56 r90
  text "7" at 2632.98,2614 h56 r90
  text "6" at 2732.98,2614 h56 r90
  text "5" at 2832.98,2614 h56 r90
  text "4" at 2932.98,2614 h56 r90
  text "3" at 3032.98,2614 h56 r90
  text "2" at 3132.98,2614 h56 r90
  text "1" at 3232.98,2614 h56 r90
  text "0" at 3332.98,2614 h56 r90
  text "22" at 4357.98,2614 h56
  text "G.Martino" at 787.98,2599 h45 r180
  text "14" at 3532.98,2579 h56 r90
  text "15" at 3632.98,2579 h56 r90
  text "16" at 3732.98,2579 h56 r90
  text "17" at 3832.98,2579 h56 r90
  text "18" at 3932.98,2579 h56 r90
  text "19" at 4032.98,2579 h56 r90
  text "20" at 4132.98,2579 h56 r90
  text "21" at 4232.98,2579 h56 r90
  text "13" at 1982.98,2564 h56 r90
  text "12" at 2082.98,2564 h56 r90
  text "11" at 2182.98,2564 h56 r90
  text "10" at 2282.98,2564 h56 r90
  text "GND" at 1887.23,2529.48 h56 r90
  text "D.Mellis" at 787.98,2519 h45 r180
  text "24" at 4357.98,2514 h56
  text "SCL1" at 1589.81,2482.48 h56 r90
  text "SDA1" at 1681.81,2482.48 h56 r90
  text "AREF" at 1781.81,2482.48 h56 r90
  text "PWM" at 2432.98,2481 h66
  text "26" at 4357.98,2414 h56
  text "TX" at 3232.98,2409 h56 r90
  text "RX" at 3332.98,2409 h56 r90
  text "TX0" at 3532.98,2409 h56 r90
  text "RX0" at 3632.98,2409 h56 r90
  text "TX1" at 3732.98,2409 h56 r90
  text "RX1" at 3832.98,2409 h56 r90
  text "TX2" at 3932.98,2409 h56 r90
  text "RX3" at 4032.98,2409 h56 r90
  text "SDA" at 4132.98,2409 h56 r90
  text "SCL" at 4232.98,2409 h56 r90
  text "28" at 4357.98,2314 h56
  text "30" at 4357.98,2214 h56
  text "31" at 4682.98,2214 h56
  text "32" at 4357.98,2114 h56
  text "33" at 4682.98,2114 h56
  text "34" at 4357.98,2014 h56
  text "35" at 4682.98,2014 h56
  text "1" at 3267.65,1968.52 h50 r180
  text "36" at 4357.98,1914 h56
  text "37" at 4682.98,1914 h56
  text "38" at 4357.98,1814 h56
  text "39" at 4682.98,1814 h56
  text "MADE IN" at 4887.98,1765 h60
  text "40" at 4357.98,1714 h56
  text "41" at 4682.98,1714 h56
  text "ITALY" at 4954.98,1693 h60
  text "DIGITAL" at 4332.98,1664 h66 r90
  text "42" at 4357.98,1614 h56
  text "43" at 4657.98,1614 h56
  text "44" at 4357.98,1514 h56
  text "45" at 4657.98,1514 h56
  text "46" at 4357.98,1414 h56
  text "47" at 4682.98,1414 h56
  text "48" at 4357.98,1314 h56
  text "49" at 4682.98,1314 h56
  text "Arduino" at 3165.98,1223 h80
  text "50" at 4357.98,1214 h56
  text "51" at 4682.98,1214 h56
  text "52" at 4357.98,1114 h56
  text "53" at 4682.98,1114 h56
  text "DUE" at 3289.98,1113 h90
  text "www.arduino.cc" at 3594.98,1088 h65
  text "ANALOG   IN" at 2958.98,993 h66
  text "GND" at 4647.98,939 h56
  text "0" at 2837.98,924 h56 r90
  text "1" at 2927.98,924 h56 r90
  text "2" at 3037.98,924 h56 r90
  text "3" at 3137.98,924 h56 r90
  text "4" at 3237.98,924 h56 r90
  text "5" at 3332.98,924 h56 r90
  text "6" at 3432.98,924 h56 r90
  text "7" at 3537.98,924 h56 r90
  text "8" at 3737.98,924 h56 r90
  text "9" at 3837.98,924 h56 r90
  text "10" at 3937.98,924 h56 r90
  text "11" at 4029.98,924 h56 r90
  text "5V" at 2267.46,907.17 h56
  text "GND" at 2387.46,907.17 h56
  text "VIN" at 2559.46,907.17 h56
  text "IOREF" at 2036.81,906.48 h56 r90
  text "RESET" at 2136.81,906.48 h56 r90
  text "3V3" at 2236.81,906.48 h56 r90
  text "DAC0" at 4125.98,900 h40 r90
  text "DAC1" at 4225.98,900 h40 r90
  text "CANRX" at 4325.98,900 h40 r90
  text "CANTX" at 4420.98,900 h40 r90
Mechanical 2:
  text "USBVCCU2" at 947.98,1571 h40
  text "PC2" at 3695.98,1423 h40
  text "PC1" at 1697.98,941 h40

## Text inside footprints (layer, text, board x,y; h text height)
IC4: Top Overlay "3" at 3841.98,1954.81 h32 r270; Top Overlay "4" at 4111.98,1920 h32 r270; Top Overlay "1" at 3841.98,2130.93 h32 r270; Top Overlay "2" at 3841.61,2045.81 h32 r270
IC6: Top Overlay "1" at 1401.93,1585.74 h32
J3: Top Layer "DELETE SOLDER PADS" at 712.98,1314 h32 r90; Top Overlay "PCB" at 812.98,1424 h40 r270
USB1: Top Layer "DELETE SOLDER PADS" at 714.98,1989 h32 r90; Top Overlay "PCB" at 801.99,2020.5 h40 r270